# Altium PCB PC110.PcbDoc (part 16 of 24)
Units mm, origin at the board's own origin, x right, y up, seen from the top; angles counter-clockwise.
Board outline 150.05 x 107.35 mm, 10 copper layers (In2.Cu, F.Cu, B.Cu, In1.Cu, In3.Cu, In4.Cu, In5.Cu, In6.Cu, In7.Cu, In8.Cu); 936 components, 1434 nets, 4891 pads, 6088 vias.
Unrouted connection lines stored in the file: 2995.
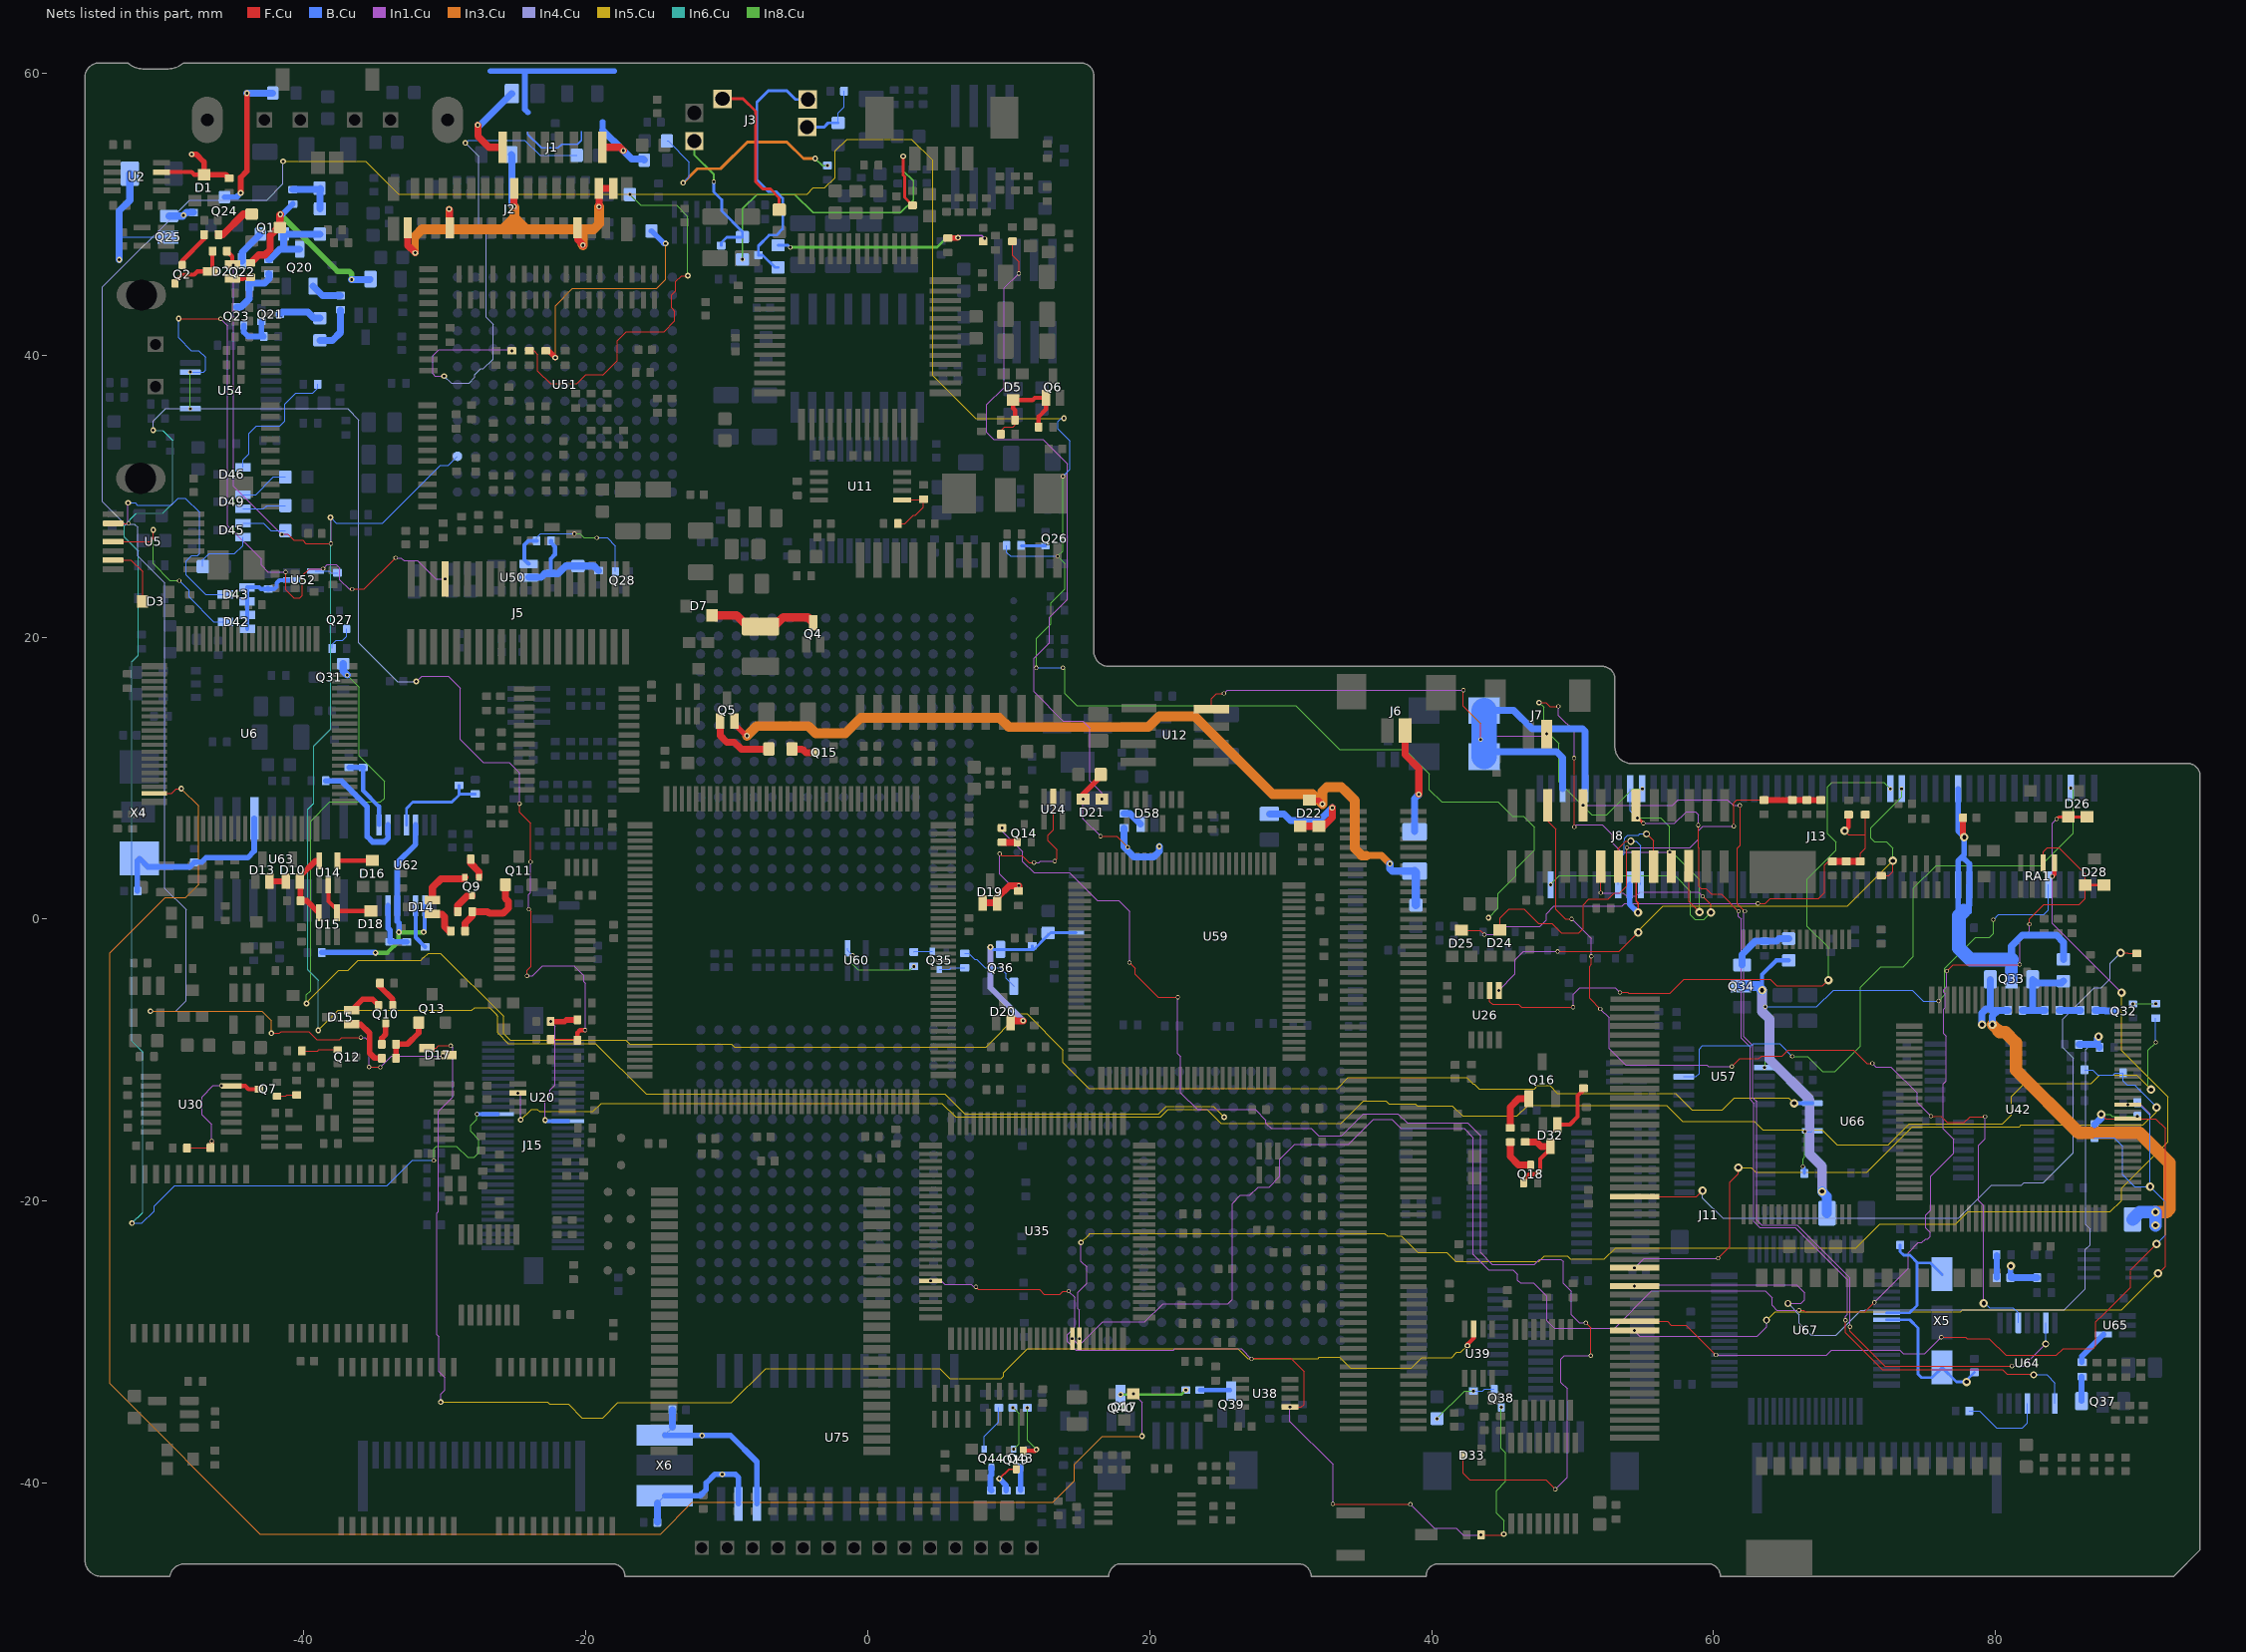
[diagram p23: the nets of this part, all layers, seen from the top]

## Via types
v1: diameter 0.3, hole 0.2, B.Cu to In8.Cu, tented both sides, 1934 vias
v2: diameter 0.4, hole 0.2, F.Cu to B.Cu, tented both sides, 1902 vias
v3: diameter 0.3, hole 0.2, F.Cu to In1.Cu, tented both sides, 1729 vias
v4: diameter 0.6, hole 0.3, F.Cu to B.Cu, tented both sides, 354 vias
v5: diameter 0.5, hole 0.3, F.Cu to B.Cu, tented both sides, 136 vias
v6: diameter 0.4, hole 0.2, B.Cu to In8.Cu, tented both sides, 12 vias
v7: diameter 0.3, hole 0.2, F.Cu to B.Cu, tented both sides, 6 vias
v8: diameter 0.6, hole 0.2, F.Cu to B.Cu, tented both sides, 4 vias
v9: diameter 0.5, hole 0.2, B.Cu to In8.Cu, tented both sides, 3 vias
v10: diameter 0.5, hole 0.2, F.Cu to B.Cu, tented both sides, 2 vias
v11: diameter 0.4, hole 0.3, F.Cu to B.Cu, tented both sides, 2 vias
v12: diameter 0.3, hole 0.2, F.Cu to In4.Cu, tented both sides, 2 vias
v13: diameter 0.6, hole 0.3, B.Cu to In8.Cu, tented both sides, 1 vias
v14: diameter 0.3, hole 0.2, F.Cu to In3.Cu, tented both sides, 1 vias

## Nets (pads, with @x,y where several pads share a name; then routed paths per layer and width w, separated by ;. In a path a pad name is that pad's centre, name@x,y a point inside that pad or via, vN(x,y) a via of type N, cw(c..) or ccw(c..) an arc to the next point about the centre after c; other vN are vias at no path point) (continued)
Net-(C238-+): C238.1 Q33.1 R293.1 R297.2 | length 6.1
  B.Cu w0.08: 82.63,-6.43 82.66,-6.46 ; Q33.1@82.63,-4.27 Q33.1@82.755,-4.395
  B.Cu w0.5: R293.1@81.9,-6.46 82.66,-6.46 R297.2@83.5,-6.46 ; 82.63,-6.43 Q33.1@82.63,-4.27 ; Q33.1@82.755,-4.395 82.89,-4.53 84.675,-4.53 C238.1@84.81,-4.395
Net-(C238--): C93.1 C238.2 C239.2 J13.13 J13.88 J13.89 Q33.2 | length 36.1
  F.Cu w0.4: C93.1@77.69,7.19 77.68,7.18 77.68,5.92 v4(77.78,5.82)
  B.Cu w0.4: J13.13@77.34,9.25 77.34,6.26 v4(77.78,5.82) ; 77.73,0.13 77.73,0.58 ; v4@77.73,5.77 v4(77.78,5.82) ; v4@77.76,5.8 v4(77.78,5.82) ; J13.89@78.13,2.46 J13.89@78.14,2.45 ; J13.88@77.34,2.45 77.34,4.14 77.63,4.43 ; J13.88@77.34,2.45 77.34,0.97 77.73,0.58 ; J13.88@77.34,2.45 77.34,0.61 77.66,0.29 77.88,0.29 78.11,0.52 78.11,2.42 J13.89@78.14,2.45 ; 77.63,4.43 77.78,4.58 v4(77.78,5.82) ; 77.63,4.43 78.14,3.92 J13.89@78.14,2.45 ; 77.73,0.58 78.14,0.99 J13.89@78.14,2.45
  B.Cu w0.5: Q33.2@81.13,-4.183 81.13,-1.9 81.89,-1.14 84.32,-1.14 84.81,-1.63 C238.2@84.81,-2.845
  B.Cu w0.9: Q33.2@81.13,-4.183 81.13,-2.86
  B.Cu w1: 77.73,0.58 77.39,0.24 77.39,-2.05 78.2,-2.86 81.13,-2.86
Net-(C240-+): C240.1 Q34.1 R294.2 | length 4.8
  B.Cu w0.08: C240.1@65.145,-1.56 C240.1@65.33,-1.375
  B.Cu w0.5: Q34.1@62.02,-3.25 62.02,-2.5 62.95,-1.57 R294.2@63.62,-1.57 64.44,-1.57 64.635,-1.375 C240.1@65.33,-1.375
Net-(C240--): C240.2 F3.2 Q34.2 | length 22.8
  In4.Cu w0.7: v4(63.44,-5.04) 63.44,-6.56 63.96,-7.08 63.96,-9.93 66.81,-12.78 66.81,-16.65 67.69,-17.53 v4(67.69,-19.31)
  B.Cu w0.3: v4(63.44,-5.04) 63.44,-3.93 64.445,-2.925 C240.2@65.33,-2.925
  B.Cu w0.7: Q34.2@61.932,-4.75 63.15,-4.75 v4(63.44,-5.04) ; v4(67.69,-19.31) 68.04,-19.66 F3.2@68.04,-20.86
Net-(C245--): C245.2 D22.2 F1.1 Q5.1 | length 62.1
  F.Cu w0.4: Q5.1@-9.47,14.04 -9.47,13.86 -8.63,13.02 v2(-8.57,13.02) ; D22.2@31.33,8.445 31.355,8.42 32,8.42 v2(32.25,8.17)
  In3.Cu w0.5: 35.35,4.51 36.46,4.51 v2(37.04,3.93)
  In3.Cu w0.7: v2(-8.57,13.02) -7.89,13.7 -4.21,13.7 -3.69,13.18 -1.59,13.18 -0.48,14.29 9.34,14.29 10,13.63 19.9,13.63 20.67,14.4 23.19,14.4 28.71,8.88 31.54,8.88 v2(32.25,8.17) 32.25,9.05 32.32,9.12 32.57,9.37 32.62,9.37 33.6,9.37 33.93,9.04 34.54,8.43 34.54,8.22 34.54,5.02 34.82,4.74 35.05,4.51 35.35,4.51
  B.Cu w0.5: v2(37.04,3.93) 37.04,3.57 37.2,3.41 F1.1@38.79,3.41
  B.Cu w0.6: F1.1@38.79,3.41 38.89,3.31 C245.2@38.89,0.995
Net-(C246-+): C246.1 D20.1 Q36.3 R327.1 U59.11 | length 14.6
  F.Cu w0.08: D20.1@10.12,-7.35 D20.1@10.27,-7.2
  F.Cu w0.5: D20.1@10.27,-7.2 v2(11.02,-7.2)
  In4.Cu w0.08: v2(11.02,-7.2) 11.02,-7.18
  In4.Cu w0.4: v2(8.7,-1.98) 8.7,-4.86 11.02,-7.18
  B.Cu w0.08: Q36.3@9.25,-2.15 9.41,-2.15 Q36.3@9.42,-2.14 ; C246.1@12.67,-1.26 12.8,-1.13 C246.1@12.8,-0.965
  B.Cu w0.2: v2(8.7,-1.98) 8.87,-2.15 9.25,-2.15 R327.1@11.66,-2.15 ; R327.1@11.67,-1.89 11.66,-1.9 R327.1@11.66,-2.15 ; U59.11@14.79,-0.96 12.97,-0.96 12.67,-1.26 11.78,-2.15 R327.1@11.66,-2.15
Net-(C257-+): C257.1 C261.1 U63.3 X4.1 | length 13.5
  B.Cu w0.08: X4.1@-51.8,4.16 X4.1@-51.66,4.3
  B.Cu w0.4: C261.1@-51.8,1.99 X4.1@-51.8,4.16 ; X4.1@-51.66,4.3 -51.07,3.71 -48.09,3.71 C257.1@-47.76,4.04 -47.26,4.04 -46.94,4.36 -43.99,4.36 -43.515,4.835 U63.3@-43.515,7.16
Net-(C264--): C264.2 U67.22 X5.2 | length 9.5
  B.Cu w0.2: U67.22@72.26,-27.91 73.91,-27.91 74.42,-27.4 74.42,-24.43 74.47,-24.38 ; C264.2@73.235,-23.11 73.235,-23.585 73.49,-23.84 73.93,-23.84 74.47,-24.38 ; X5.2@76.21,-25.2 75.39,-24.38 74.47,-24.38
Net-(C266-Pad1): C266.1 C269.2 | length 2.7
  B.Cu w0.08: v4@81.06,-24.62 v4(81.08,-24.6)
  B.Cu w0.4: C266.1@81.06,-25.43 v4@81.06,-24.62
  B.Cu w0.5: C266.1@81.105,-25.43 C269.2@82.955,-25.43
Net-(C266-Pad2): C266.2 R362.2 | length 1.6
  B.Cu w0.08: R362.2@80.06,-23.815 R362.2@80.09,-23.815
  B.Cu w0.4: C266.2@80.09,-25.43 R362.2@80.09,-23.815
Net-(C268--): C268.2 U67.23 X5.1 | length 10.9
  B.Cu w0.2: U67.23@72.26,-28.41 73.92,-28.41 74.5,-28.99 74.5,-32.268 74.742,-32.51 75.44,-32.51 75.45,-32.5 75.51,-32.5 76.21,-31.8 77.23,-32.82 v4(77.94,-32.82) 77.94,-32.695 C268.2@78.49,-32.145
Net-(C270-Pad1): C270.1 U64.11 | length 6.2
  B.Cu w0.08: C270.1@78.135,-34.88 78.85,-34.88 80.06,-36.09 81.9,-36.09 82.26,-35.73 U64.11@82.26,-34.353
Net-(C281--): C281.2 U75.26 X6.1 | length 12.3
  B.Cu w0.08: X6.1@-14.41,-36.59 X6.1@-13.85,-36.03
  B.Cu w0.4: X6.1@-14.41,-36.59 -14.38,-36.62 v2(-11.75,-36.62) -9.73,-36.62 -7.86,-38.49 U75.26@-7.86,-41.465
  B.Cu w0.5: X6.1@-13.85,-36.03 C281.2@-13.85,-34.8
Net-(C283-+): C283.1 U75.27 X6.2 | length 10.2
  B.Cu w0.08: X6.2@-14.93,-41.41 X6.2@-14.41,-40.89
  B.Cu w0.4: X6.2@-14.41,-40.89 -11.89,-40.89 -11.46,-40.46 -11.46,-39.98 -10.85,-39.37 v2(-10.32,-39.37) -9.39,-39.37 -9.16,-39.6 U75.27@-9.16,-41.465
  B.Cu w0.5: C283.1@-14.93,-42.78 X6.2@-14.93,-41.41
Net-(D1-K): D1.2 R4.2 U2.3 | length 7
  F.Cu w0.3: U2.3@-50.09,52.99 -47.96,52.99 -47.775,52.805 D1.2@-47.08,52.805
  F.Cu w0.4: v2(-47.96,54.25) -47.62,54.25 -47.08,53.71 D1.2@-47.08,52.805 -45.555,52.805 R4.2@-45.3,52.55
Net-(D2-A): D2.2 R3.1 | length 1.3
  F.Cu w0.4: D2.2@-45.07,45.44 -44.34,45.44 -44.26,45.52 R3.1@-43.78,45.52
Net-(D2-common): D2.3 Q2.1 R12.1 | length 4.3
  F.Cu w0.3: Q2.1@-49.13,45.23 -48.65,45.71 -47.78,45.71 -47.55,45.94 D2.3@-46.62,45.94 -46.49,46.07 -46.49,47.38 R12.1@-46.48,47.39
Net-(D2-K): D2.1 R12.2 U51.A11 | length 145.1
  F.Cu w0.08: v3(-41.55,27.3) -41.14,27.3 -40.71,26.87 -40.08,26.87 -39.85,26.64 v3(-38.07,26.64)
  F.Cu w0.3: R12.2@-45.46,47.39 -45.07,47 D2.1@-45.07,46.44
  In1.Cu w0.08: v3(-45.01,46.38) -45,46.37 -45,30.72 -41.58,27.3 v3(-41.55,27.3) ; v2(-38.11,28.5) -38.07,28.46 v3(-38.07,26.64)
  In5.Cu w0.08: v2(-38.98,-7.88) -37.57,-6.47 -28.09,-6.47 -27.89,-6.27 -26.81,-6.27 -26.32,-6.76 -26.32,-6.81 -26.26,-6.87 -26.26,-8.04 -25.49,-8.81 -19.31,-8.81 -15.71,-12.41 5.47,-12.41 6.88,-13.82 20.63,-13.82 21.18,-13.27 24.52,-13.27 25.28,-14.03 v2(25.28,-14.04)
  In6.Cu w0.08: v2(-38.98,-7.88) -38.98,-4.32 -39.725,-3.575 -39.725,7.8 -39.3,8.225 -39.3,12.3 -38.1,13.5 -38.1,28.49 v2(-38.11,28.5)
  B.Cu w0.08: v2(-38.11,28.5) -37.71,28.1 -34.41,28.1 -30.31,32.2 -29.74,32.2 U51.A11@-29.1,32.84
Net-(D3-K): D3.2 U5.6 | length 4.5
  F.Cu w0.08: U5.6@-53.533,25.47 -52.26,25.47 -51.435,24.645 D3.2@-51.435,22.54
Net-(D5-K): D5.2 Q6.2 R71.1 R74.1 R78.2 | length 7.9
  F.Cu w0.08: R71.1@9.44,34.41 9.44,34.64 9.72,34.92 10.3,34.92 10.45,35.07 R78.2@10.45,35.4
  F.Cu w0.3: R78.2@10.45,35.4 10.45,36.09 10.31,36.23 D5.2@10.31,36.825 11.685,36.825 11.84,36.98 Q6.2@12.64,36.98 12.64,36.17 12.12,35.65 R74.1@12.12,34.91
Net-(D7-K): D7.3 L4.2 Q4.3 | length 7.9
  F.Cu w0.6: D7.3@-11.035,21.55 -9.3,21.55 -8.5,20.75 L4.2@-7.6,20.75 -6.66,20.75 -5.99,21.42 -4.26,21.42 Q4.3@-3.87,21.03
Net-(D10-A): D10.2 D13.1 | length 1.2
  F.Cu w0.4: D13.1@-42.44,2.69 D10.2@-41.27,2.69
Net-(D10-K): C58.2 D10.1 U14.5 U15.5 | length 5.2
  F.Cu w0.08: D10.1@-40.27,2.79 D10.1@-40.27,2.69 D10.1@-40.23,2.65
  F.Cu w0.4: D10.1@-40.27,2.79 -40.27,3.03 -39.15,4.15 U14.5@-38.91,4.15 ; D10.1@-40.23,2.65 C58.2@-40.23,1.31 -39.79,1.31 U15.5@-38.95,0.47
Net-(D14-Pad2): D14.2 R93.1 | length 2.2
  F.Cu w0.5: D14.2@-30.88,0.36 -30.21,0.36 -30.01,0.16 -30.01,-0.53 -29.7,-0.84 R93.1@-29.58,-0.84
Net-(D15-Pad2): D15.2 R95.1 | length 4
  F.Cu w0.4: D15.2@-36.6,-7.45 -35.97,-7.45 -35.34,-8.08 -35.34,-9.49 -34.98,-9.85 R95.1@-34.47,-9.85
Net-(D16-K): D16.2 U14.4 | length 2.5
  F.Cu w0.08: D16.2@-35.155,4.15 D16.2@-35.14,4.165
  F.Cu w0.3: U14.4@-37.61,4.15 D16.2@-35.155,4.15
Net-(D17-Pad2): D17.2 U39.3 | length 106.6
  F.Cu w0.08: D17.2@-31.27,-9.14 -30.61,-9.14 -30.44,-8.97 v3(-29.58,-8.97)
  F.Cu w0.3: v2(42.54,-30.25) 42.54,-30.15 42.99,-29.7 U39.3@42.99,-29.05
  In1.Cu w0.08: v2(-30.29,-34.25) -30.29,-33.67 -30.01,-33.39 -30.01,-32.51 -30.42,-32.1 -30.42,-29.6 -30.55,-29.47 -30.55,-20.83 -30.44,-20.72 -30.44,-13.62 -29.44,-12.62 -29.44,-9.11 v3(-29.58,-8.97)
  In5.Cu w0.08: v2(-30.29,-34.25) -22.73,-34.25 -22.58,-34.4 -21.22,-34.4 -20.26,-35.36 -18.78,-35.36 -17.71,-34.29 -9.66,-34.29 -7.24,-31.87 5.11,-31.87 5.82,-32.58 9.47,-32.58 9.63,-32.42 9.63,-32.16 11.34,-30.45 26.25,-30.45 26.95,-31.15 31.94,-31.15 32.02,-31.07 33.47,-31.07 34.23,-31.83 38.56,-31.83 39.29,-31.1 41.41,-31.1 41.79,-30.72 42.07,-30.72 v2(42.54,-30.25)
Net-(D17-Pad3): D17.3 R254.2 | length 248.4
  F.Cu w0.08: v2(-42.3,-8.09) -41.72,-8.09 -41.6,-7.97 -39.65,-7.97 -39.07,-8.55 -37.46,-8.55 -37.3,-8.39 v3(-35.96,-8.39) ; v3(-35.37,-10.48) -34.59,-10.48 v3(-34.57,-10.5) ; v3(-30.14,-9.7) -29.78,-9.7 D17.3@-29.72,-9.64
  In1.Cu w0.08: v3(-35.96,-8.39) -35.64,-8.39 -35.37,-8.66 v3(-35.37,-10.48) ; v3(-34.57,-10.5) -33.77,-9.7 v3(-30.14,-9.7)
  In3.Cu w0.08: v2(-50.88,-6.53) -42.97,-6.53 -42.3,-7.2 v2(-42.3,-8.09)
  In4.Cu w0.08: v2(-50.88,-6.53) -49.1,-6.53 -48.36,-5.79 -48.36,0.68 -49.87,2.19 -49.87,23.85 -51.77,25.75 -51.77,27.79 -52.01,28.03 -52.68,28.03 -54.27,29.62 -54.27,44.84 -48.11,51 -42.63,51 -41.47,52.16 v2(-41.47,53.75)
  In5.Cu w0.08: v2(-41.47,53.75) -35.62,53.75 -33.3,51.43 -4.3,51.43 -3.86,51.87 -3.05,51.87 -2.32,52.6 -2.31,52.6 -2.31,54.49 -1.47,55.33 3.11,55.33 4.62,53.82 4.62,38.56 7.65,35.53 v2(13.92,35.53)
  In8.Cu w0.08: v1(11.96,17.83) 11.96,19.93 12.99,20.96 12.99,22.42 13.99,23.42 13.99,25.22 v1(13.47,25.74) 13.85,26.12 v1(13.85,31.41) ; v1(13.85,17.84) 14,17.69 14,16 14.84,15.16 30.37,15.16 33.48,12.05 38.1,12.05 39.84,10.31 39.84,9.17 40.7,8.31 44.72,8.31 45.72,7.31 46.5,7.31 47.3,6.51 47.3,4.91 45.98,3.59 45.98,3.09 44.71,1.82 44.71,0.78 v2(44.03,0.1)
  B.Cu w0.08: R254.2@9.85,26.51 9.85,26.02 10.13,25.74 v1(13.47,25.74) ; v1(11.96,17.83) 13.84,17.83 v1(13.85,17.84) ; v1(13.85,31.41) 14.35,31.91 14.35,33.91 13.49,34.77 13.49,35.31 13.71,35.53 v2(13.92,35.53)
Net-(D18-K): D18.2 U14.2 U15.4 | length 4.7
  F.Cu w0.08: U15.4@-37.65,0.47 -37.65,0.67 U15.4@-37.555,0.575
  F.Cu w0.3: U14.2@-38.26,2.45 -38.26,1.28 U15.4@-37.65,0.67 ; U15.4@-37.555,0.575 D18.2@-35.24,0.575
Net-(D19-Pad1): D19.1 D19.2 R112.2 U24.2 | length 16
  F.Cu w0.08: v3(9.35,4.64) 9.49,4.5 10.96,4.5 11.44,4.02 v3(11.8,4.02) ; R112.2@10.69,1.99 R112.2@10.72,2.02 ; U24.2@13.16,8.65 13.16,6.34 12.78,5.96 12.78,5.57 13.43,4.92 13.43,4.29 v3(13.26,4.12)
  F.Cu w0.5: D19.2@8.17,1.16 D19.1@9.17,1.16 9.17,1.51 10.04,2.38 10.43,2.38 v3(10.72,2.38) R112.2@10.72,2.02
  In1.Cu w0.08: v3(9.35,4.64) 9.35,3.21 10.18,2.38 v3(10.72,2.38) ; v3(11.8,4.02) 12.14,4.02 12.24,4.12 v3(13.26,4.12)
Net-(D21-A-Pad3): D21.3 R31.1 | length 48.9
  F.Cu w0.08: R31.1@10.27,48.08 10.27,47.07 10.72,46.62 v3(10.72,45.8)
  In1.Cu w0.08: v3(10.72,45.8) 9.68,44.76 9.68,37.72 8.45,36.49 8.45,34.52 8.93,34.04 12.44,34.04 14.17,32.31 14.17,22.67 12.9,21.4 12.9,19.61 11.79,18.5 11.79,16.13 13.86,14.06 15.27,14.06 15.76,13.57 15.76,9.81 16.6,8.97 v3(16.6,8.525)
Net-(D22-A-Pad1): D22.1 D22.3 R313.2 | length 8.2
  F.Cu w0.5: D22.3@30.68,6.595 D22.1@32.005,6.595 32.325,6.595 32.95,7.22 v2(32.95,7.9)
  B.Cu w0.5: R313.2@28.49,7.462 29.518,7.462 29.99,6.99 32.04,6.99 v2(32.95,7.9)
Net-(D23-K): D21.1 D23.1 R308.1 | length 15.5
  F.Cu w0.08: v3(16.52,5.89) 17.66,5.89 v3(18.44,5.11)
  F.Cu w0.4: v3(15.275,8.525) 15.275,8.865 16.528,10.118 D23.1@16.527,10.26
  In1.Cu w0.08: v3(15.275,8.525) 15.275,7.135 v3(16.52,5.89) ; v3(18.44,5.11) 18.44,4.76 18.62,4.58 20.52,4.58 20.68,4.74 v2(20.68,5.16)
  B.Cu w0.5: R308.1@18.18,6.47 18.18,5.12 18.89,4.41 20.28,4.41 20.68,4.81 v2(20.68,5.16)
Net-(D24-K): D24.2 R132.2 R136.2 R137.2 R141.2 | length 32.4
  F.Cu w0.08: D24.2@44.84,-0.765 44.84,0.07 45.49,0.72 46.55,0.72 47.58,-0.31 48.54,-0.31 49.21,-0.98 50.43,-0.98 50.75,-0.66 50.75,1.02 51.15,1.42 52.52,1.42 52.96,1.86 53.35,1.86 53.85,2.36 53.85,5.07 v3(53.86,5.08) ; v3(61.44,6.6) 61.44,8.24 61.65,8.45 R137.2@63.58,8.45
  F.Cu w0.4: R137.2@63.58,8.45 R136.2@65.6,8.45 R141.2@66.61,8.45 R132.2@67.61,8.45
  In1.Cu w0.08: v3(53.86,5.08) 58.32,5.08 58.91,5.67 58.91,6.27 59.24,6.6 v3(61.44,6.6)
Net-(D25-K): D25.2 R133.2 R138.2 R140.1 R142.2 R143.1 | length 38.3
  F.Cu w0.08: D25.2@42.105,-0.78 43.43,-0.78 v3(43.74,-1.09) ; v3(63.14,1.11) 63.66,1.11 64.02,1.47 67.46,1.47 67.87,1.88 67.87,3.85 68.12,4.1 R133.2@68.43,4.1 ; v4(69.3,6.26) 69.57,5.99 70.76,5.99 ; R138.2@70.41,4.1 70.41,4.67 70.76,5.02 70.76,5.99 ; R143.1@70.76,7.42 70.76,5.99
  F.Cu w0.3: v4(69.3,6.26) 69.57,6.53 R140.1@69.57,7.42
  F.Cu w0.5: R133.2@68.43,4.1 R142.2@69.4,4.1 R138.2@70.41,4.1
  In1.Cu w0.08: v3(43.74,-1.09) 44.51,-1.09 45.09,-0.51 47.69,-0.51 48.13,-0.07 48.13,0.38 48.68,0.93 53.5,0.93 53.68,1.11 v3(63.14,1.11)
Net-(D32-A): D32.2 R129.1 | length 3.9
  F.Cu w0.3: D32.2@48.91,-14.57 49.8,-14.57 50.36,-14.01 50.36,-12.52 50.77,-12.11 R129.1@50.77,-11.99
Net-(D32-common): D32.3 Q18.1 R180.1 | length 5.6
  F.Cu w0.08: Q18.1@46.52,-18.73 Q18.1@46.52,-18.51
  F.Cu w0.3: Q18.1@46.52,-18.51 46.94,-18.09 47.39,-18.09 47.7,-17.78 47.7,-17.01 48.41,-16.3 D32.3@48.41,-16.12
  F.Cu w0.5: R180.1@46.64,-15.8 47.46,-15.8 47.78,-16.12 D32.3@48.41,-16.12
Net-(D33-Pad3): D33.3 R114.2 | length 93.9
  F.Cu w0.08: v3(18.57,-3.08) 18.96,-3.47 18.96,-3.9 20.61,-5.55 21.98,-5.55 v3(21.99,-5.54) ; D33.3@42.23,-38.01 42.23,-39.29 42.69,-39.75 48.09,-39.75 v3(48.77,-40.43) ; v3(50.93,-28.63) 51.29,-28.99 v3(51.29,-30.96)
  In1.Cu w0.08: v3(9.53,6.47) 9.53,6.25 10.99,4.79 10.99,4.1 11.8,3.29 14.31,3.29 16.29,1.31 17.79,1.31 18.57,0.53 v3(18.57,-3.08) ; v3(21.99,-5.54) 21.99,-9.53 22.2,-9.74 22.2,-12.31 23.39,-13.5 27.49,-13.5 28.24,-14.25 28.24,-14.47 28.62,-14.85 31.46,-14.85 31.97,-15.36 33.62,-15.36 35.17,-13.81 37.62,-13.81 38.27,-14.46 42.55,-14.46 43.46,-15.37 43.46,-23.65 44.3,-24.49 47.28,-24.49 47.65,-24.12 49.16,-24.12 49.33,-24.29 49.33,-25.82 49.91,-26.4 49.91,-28.07 50.47,-28.63 v3(50.93,-28.63) ; v3(48.77,-40.43) 49.61,-39.59 49.61,-33.3 49.17,-32.86 49.17,-31.19 49.4,-30.96 v3(51.29,-30.96)
Net-(D36-K): D36.1 L14.2 R236.2 | length 3.7
  B.Cu w0.5: R236.2@-40.78,51.75 -38.907,51.75 L14.2@-38.827,51.83 ; D36.1@-38.857,50.38 -38.857,51.8 L14.2@-38.827,51.83 ; L14.2@-38.857,51.627 -38.827,51.657 L14.2@-38.827,51.83
Net-(D38-A): D38.2 Q21.3 | length 3.1
  B.Cu w0.5: Q21.3@-41.71,42.89 -41.54,43.06 -39.72,43.06 -39.29,42.63 D38.2@-38.86,42.63
Net-(D38-K): D38.1 R232.2 | length 3.3
  B.Cu w0.5: D38.1@-38.86,41.055 -37.965,41.055 -37.39,41.63 R232.2@-37.39,43.21
Net-(D39-A): D39.2 D55.2 J13.46 J13.48 | length 23.2
  B.Cu w0.08: D55.2@43.72,11.53 D55.2@44.06,11.87
  B.Cu w0.5: D39.2@43.72,14.8 45.83,14.8 47.13,13.5 50.71,13.5 50.89,13.32 J13.46@50.89,9.25 ; D55.2@44.06,11.87 48.87,11.87 49.29,11.45 J13.48@49.29,9.25
  B.Cu w1.8: D55.2@43.72,11.53 D39.2@43.72,14.8
Net-(D41-K): D41.1 R260.1 R266.2 R271.2 U50.2 | length 8
  B.Cu w0.3: R271.2@-22.49,24.52 -22.49,25.56 -22.18,25.87 -22.18,26.41 -22.46,26.69 R260.1@-22.46,26.83
  B.Cu w0.5: U50.2@-24.052,24.25 -23.16,24.25 -22.89,24.52 R271.2@-22.49,24.52 -21.96,24.52 -21.432,25.047 D41.1@-20.56,25.047 -19.427,25.047 R266.2@-19.1,24.72
Net-(D42-Pad1): D42.1 D42.2 D43.1 D43.2 R287.1 U52.2 | length 6.6
  B.Cu w0.3: D42.1@-44.01,20.59 D42.2@-44.01,21.59 -44.02,21.6 D43.1@-44.02,22.54 D43.2@-44.02,23.54 -43.16,23.54 -43.04,23.42 R287.1@-42.52,23.42 -42.1,23.42 -41.93,23.59 -41.93,23.85 -41.73,24.05 U52.2@-40.88,24.05
  B.Cu w0.4: R287.1@-42.54,23.44 R287.1@-42.52,23.42
Net-(D42-Pad3): D42.3 U5.4 | length 13.1
  F.Cu w0.08: U5.4@-53.533,26.77 -50.86,26.77 -50.68,26.95 v2(-50.68,27.61)
  In8.Cu w0.08: v2(-50.68,27.61) -50.68,25.22 -49.5,24.04 -49.47,24.01 v1(-48.84,24.01)
  B.Cu w0.08: v1(-48.84,24.01) -48.835,24.01 -48.15,23.325 -48.15,22.84 -46.4,21.09 D42.3@-45.56,21.09
Net-(D43-Pad3): D43.3 U5.2 | length 16.9
  F.Cu w0.08: U5.2@-53.533,28.07 v3(-52.43,28.07)
  In1.Cu w0.08: v2(-52.47,29.53) -52.47,28.11 v3(-52.43,28.07)
  B.Cu w0.08: v2@-52.41,29.59 v2(-52.47,29.53) -51.96,29.53 -51.8,29.37 -49.4,29.37 -48.9,29.87 -48.4,29.87 -47.38,28.85 -47.38,25.94 -47.53,25.79 -47.96,25.79 -48.35,25.4 -48.35,24.42 -46.97,23.04 D43.3@-45.57,23.04
Net-(D44-A): D44.2 D45.1 | length 4.3
  B.Cu w0.08: D44.2@-47.168,25.01 -47.168,25.482 -46.73,25.92 -44.91,25.92 -44.33,26.5 D45.1@-44.33,27.1
Net-(D46-Pad2): D46.2 R286.1 | length 9.8
  B.Cu w0.08: D46.2@-44.32,32.05 -44.32,32.57 -43.9,32.99 -43.9,34.46 -43.37,34.99 -41.71,34.99 -41.35,35.35 -41.35,36.53 -40.56,37.32 -39.38,37.32 -39.02,37.68 R286.1@-39.02,37.95
Net-(D48-A): D45.2 D48.2 | length 3.2
  B.Cu w0.08: D45.2@-44.33,28.1 -42.88,28.1 -42.35,27.57 D48.2@-41.307,27.57
Net-(D50-A): D49.1 D50.2 | length 3.1
  B.Cu w0.08: D49.1@-44.32,29.1 -42.87,29.1 -42.63,29.34 D50.2@-41.307,29.34
Net-(D51-A): D49.2 D51.2 | length 3.5
  B.Cu w0.08: D49.2@-44.32,30.1 -43.41,30.1 -42.15,31.36 D51.2@-41.307,31.36
Net-(D58-K): D58.1 R308.2 | length 1.5
  B.Cu w0.5: R308.2@18.18,7.49 18.61,7.49 D58.1@19.35,6.75
Net-(J1-GND-Pad1): J1.1 R231.2 | length 23.1
  F.Cu w0.5: J1.1@-18.84,54.75 -17.58,54.75 v2(-17.34,54.51)
  B.Cu w0.08: -17.98,60.16 -17.94,60.2
  B.Cu w0.1: -24.11,55.85 -24.11,55.66 -23.15,54.7 -21.96,54.7 -21.69,54.97 -20.59,54.97 -20.31,55.25 -20.31,55.87
  B.Cu w0.4: -26.76,60.16 -24.32,60.16 ; -24.11,57.23 -24.32,57.44 -24.32,60.16 ; -18.81,55.98 -18.81,56.56 ; -17.98,60.16 -24.32,60.16
  B.Cu w0.5: -18.81,55.98 v2(-17.34,54.51) -16.74,53.91 -15.925,53.91 R231.2@-15.855,53.84
Net-(J1-GND-Pad8): J1.8 R230.2 | length 6.2
  F.Cu w0.5: v2(-27.66,56.33) -27.66,55.54 -26.87,54.75 J1.8@-25.89,54.75
  B.Cu w0.5: v2(-27.66,56.33) -27.51,56.33 -25.28,58.56 R230.2@-25.242,58.56
Net-(J2-Pin_1): J2.1 J2.7 J2.16 J2.25 J2.28 J2.30 L10.1 | length 34.7
  F.Cu w0.5: J2.1@-32.63,49.03 -32.62,49.02 -32.62,47.78 v2(-32.1,47.26) ; v2(-29.7,50.36) -29.66,50.32 -29.66,49.06 J2.7@-29.63,49.03 ; v2(-25.1,50.54) -25.1,51.81 J2.16@-25.08,51.83 ; J2.25@-20.58,49.03 -20.58,48.19 v2(-20.2,47.81) ; v2(-19.06,50.53) -19.06,51.81 J2.28@-19.08,51.83 J2.30@-18.03,51.83
  In3.Cu w0.08: -32.1,48.45 -32.03,48.52
  In3.Cu w0.5: v2(-32.1,47.26) -32.1,48.45 ; -29.7,48.93 v2(-29.7,50.36)
  In3.Cu w0.7: -32.03,48.52 -31.62,48.93 -30.32,48.93 -26.06,48.93 ; v2(-25.1,50.54) -25.06,50.5 -25.06,49.76 ; v2(-20.2,47.81) -20.22,47.83 -20.22,48.8 -20.09,48.93 ; v2(-19.06,50.53) -19.06,49.91 -19.06,49.32 -19.38,49 -19.45,48.93 -20.09,48.93 ; -26.06,48.93 -25.89,48.93 -25.06,49.76 ; -26.06,48.93 -25.06,48.93 ; -25.06,48.93 -24.21,48.93 ; -25.06,48.93 -25.06,49.76 ; -25.06,49.76 -24.23,48.93 -24.21,48.93 ; -24.21,48.93 -20.09,48.93
  B.Cu w0.5: L10.1@-25.278,54.23 -25.24,54.193 -25.24,50.68 v2(-25.1,50.54)
Net-(J3-G): J3.3 L2.2 | length 10.7
  F.Cu w0.2: J3.3@-10.3,58.19 -8.85,58.19 -7.96,57.3 -7.96,52.31 -7.44,51.79 -6.9,51.79 -6.28,51.17 L2.2@-6.28,50.317
Net-(J3-MO): C148.2 J3.5 L8.2 | length 9.4
  In8.Cu w0.15: -12.31,54.53 -12.31,54.22 -10.92,52.83 v1(-10.92,52.31)
  B.Cu w0.2: v1(-10.92,52.31) -10.92,51.59 -10.36,51.03 -10.36,50.23 -8.89,48.76 L8.2@-8.89,48.375 -9.995,48.375 -10.4,47.97 C148.2@-10.4,47.78
Net-(J3-SI): C165.1 J3.2 L7.2 | length 4.7
  B.Cu w0.08: L7.2@-2.1,56.477 -2.1,57.2 -1.68,57.62 C165.1@-1.68,58.73
  B.Cu w0.2: J3.2@-4.3,56.19 -3.09,56.19 -2.802,56.477 L7.2@-2.1,56.477
Net-(J3-SO): C159.2 J3.1 L5.1 | length 18.9
  B.Cu w0.2: L5.1@-6.36,46.223 -6.572,46.223 -7.45,47.1 C159.2@-7.76,47.1 -7.76,47.75 -6.99,48.52 -6.47,48.52 -6.03,48.96 -6.03,51.13 -6.5,51.6 -7.03,51.6 -7.86,52.43 -7.86,57.94 -7.05,58.75 -5.74,58.75 -5.13,58.14 J3.1@-4.25,58.14
Net-(J5-Pin_17): J5.17 U54.2 U54.6 | length 49.5
  F.Cu w0.08: v2(-48.88,42.6) -45.91,42.6 v3(-45.9,42.59) ; v3(-41.29,24.63) -41.29,23.36 -40.71,22.78 -40.27,22.78 -40.1,22.95 -40.1,24.36 -39.61,24.85 v3(-38.63,24.85) ; v3(-36.57,23.41) -35.71,23.41 v3(-33.49,25.63)
  In1.Cu w0.08: v3(-45.9,42.59) -45.4,42.09 -45.4,27.92 -43.02,25.54 -43.02,25.12 -42.53,24.63 v3(-41.29,24.63) ; v3(-38.63,24.85) -38.33,25.15 -37.7,25.15 -37.44,24.89 -37.44,24.06 -36.79,23.41 v3(-36.57,23.41) ; v3(-33.49,25.63) -33.1,25.63 -32.91,25.44 -31.93,25.44 -30.62,24.13 v3(-29.98,24.13)
  In8.Cu w0.08: v1(-48.055,36.21) -48.06,36.215 -48.06,38.805 v1(-48.055,38.81)
  B.Cu w0.08: v2(-48.88,42.6) -48.88,41.23 -47.99,40.34 -47.45,40.34 -46.97,39.86 -46.97,38.96 -47.12,38.81 v1(-48.055,38.81)
Net-(J6-Pin_1): F1.2 J6.1 | length 7.7
  F.Cu w0.5: J6.1@38.11,13.38 38.11,11.67 39.09,10.69 v2(39.09,8.86)
  B.Cu w0.5: F1.2@38.79,6.21 38.79,8.56 v2(39.09,8.86)
Net-(J7-Pin_1): J7.1 U12.8 | length 27.7
  F.Cu w0.08: U12.8@24.39,14.91 24.39,15.66 24.74,16.01 v3(25.27,16.01) ; v3(42.25,16.24) 42.25,15.12 43.48,13.89 v3(43.48,12.74)
  In1.Cu w0.08: v3(25.27,16.01) 25.5,16.24 v3(42.25,16.24) ; v3(43.48,12.74) 43.74,13 48.02,13 v3(48.16,13.14)
Net-(J8-DRT1#): J8.6 U64.8 | length 66.9
  F.Cu w0.08: v3(58.91,6.67) 58.91,5.07 58.95,5.03 58.95,2.3 59.09,2.16 59.46,2.16 59.83,1.79 60.54,1.79 v3(61.77,0.56) ; v3(69.35,-28.44) 69.35,-29.33 71.97,-31.95 80.48,-31.95 80.81,-32.28 82.68,-32.28 v5(82.71,-32.31)
  F.Cu w0.2: J8.6@54.49,8.08 54.49,7.33 v3(55.02,6.8)
  In1.Cu w0.08: v3(55.02,6.8) 57.24,6.8 58.06,7.62 58.71,7.62 58.91,7.42 v3(58.91,6.67) ; v3(61.77,0.56) 61.77,0.2 61.96,0.01 61.96,-8.43 62.59,-9.06 62.59,-12.8 62.84,-13.05 62.84,-21.46 63.26,-21.88 65.79,-21.88 69.5,-25.59 69.5,-28.02 69.35,-28.17 v3(69.35,-28.44)
  B.Cu w0.08: v5(82.71,-32.31) 83.63,-32.31 84.21,-32.89 U64.8@84.21,-34.353
Net-(J8-RTS1#): J8.9 U64.6 | length 70.7
  F.Cu w0.08: v3(61.86,8.07) 61.9,8.03 61.9,5.24 61.69,5.03 61.69,1.08 v3(62.21,0.56) ; v3(69.67,-28.9) 69.67,-29.22 72.14,-31.69 v3(81.17,-31.69)
  In1.Cu w0.08: v3(50.74,8.08) 57.09,8.08 57.48,8.47 60.99,8.47 61.39,8.07 v3(61.86,8.07) ; v3(62.21,0.56) 62.14,0.49 62.14,-8.33 62.79,-8.98 62.79,-12.68 63.045,-12.935 63.045,-21.325 63.41,-21.69 65.91,-21.69 69.67,-25.45 v3(69.67,-28.9) ; v3(81.17,-31.69) 81.99,-31.69 v5(83.56,-30.12)
  B.Cu w0.08: v5(83.56,-30.12) U64.6@83.56,-28.627
Net-(J8-TXD1): J8.11 U64.3 | length 66.8
  F.Cu w0.08: J8.11@48.24,8.08 48.24,6.95 48.82,6.37 48.82,0.7 49.5,0.02 v3(49.92,0.02) ; v3(51.33,-2.63) 51.33,-3.2 51.2,-3.33 51.2,-5.61 v3(51.96,-6.37) ; v3(61.29,-10.45) 61.85,-9.89 63.22,-9.89 63.41,-9.7 64.86,-9.7 65.29,-9.27 69.92,-9.27 70.87,-10.22 v3(71.27,-10.22) ; v3(75.42,-13.97) 76.14,-13.97 76.58,-14.41 77.78,-14.41 78.18,-14.01 v3(79.26,-14.01)
  In1.Cu w0.08: v3(49.92,0.02) 49.95,0.02 51.33,-1.36 v3(51.33,-2.63) ; v3(51.96,-6.37) 52.59,-7 52.59,-9.16 53.78,-10.35 59.53,-10.35 59.63,-10.45 v3(61.29,-10.45) ; v3(71.27,-10.22) 71.52,-10.47 72.59,-10.47 74.46,-12.34 74.46,-13.01 v3(75.42,-13.97) ; v4(79.16,-27.24) 79.16,-20.33 78.79,-19.96 78.79,-16.03 79.26,-15.56 v3(79.26,-14.01)
  B.Cu w0.08: v4(79.16,-27.24) 79.23,-27.24 79.56,-27.57 81.25,-27.57 81.61,-27.93 U64.3@81.61,-28.627
Net-(J11-CE1#): J11.13 R361.1 R366.1 U42.37 | length 58.4
  F.Cu w0.08: v4(87.5,-13.84) 87.81,-14.15 91.36,-14.15 92.04,-14.83 92.04,-24.62 v4(91.53,-25.13)
  In1.Cu w0.08: v3(54.39,-29.18) 54.77,-29.56 63.09,-29.56 63.76,-28.89 v5(63.76,-28.44)
  In5.Cu w0.08: v5(63.76,-28.44) 64.37,-27.83 77.53,-27.83 77.65,-27.71 88.95,-27.71 v4(91.53,-25.13)
  In8.Cu w0.08: v4(87.5,-13.84) 88.13,-13.84 88.27,-13.98 v1(90.06,-13.98)
  B.Cu w0.5: R366.1@87.02,-14.57 87.5,-14.09 v4(87.5,-13.84)
Net-(J11-CE2#): J11.14 R360.1 R367.1 U42.39 | length 69.3
  F.Cu w0.08: J11.14@54.39,-28.53 56.72,-28.53 56.99,-28.8 58.05,-28.8 v3(60.16,-30.91) ; v3(76.15,-29.65) 77.88,-29.65 77.98,-29.75 79.55,-29.75 80.73,-30.93 84.31,-30.93 84.79,-30.45 86.91,-30.45 87.12,-30.24 87.12,-28.55 87.7,-27.97 87.71,-27.97 89.57,-26.11 89.57,-24.88 v4(91.42,-23.03)
  In1.Cu w0.08: v3(60.16,-30.91) 68,-30.91 68.35,-30.56 73.2,-30.56 73.46,-30.82 74.98,-30.82 v3(76.15,-29.65) ; v3(89.385,-13.15) 90.29,-13.15 90.95,-13.81 90.95,-13.8 90.95,-18.95 v4(90.97,-18.97)
  B.Cu w0.08: R367.1@86.995,-15.49 88.4,-15.49 89,-16.09 89,-18.12 89.85,-18.97 v4(90.97,-18.97) ; R360.1@90.015,-12.98 90.04,-12.98 90.97,-13.91 v4(90.97,-18.97) ; v4@91.24,-18.97 v4(90.97,-18.97) ; v4(91.42,-23.03) 92.05,-22.4 92.05,-20.05 v4(90.97,-18.97)
Net-(J11-CSEL#): J11.28 R145.2 | length 51.9
  F.Cu w0.08: J11.28@54.39,-19.68 58.8,-19.68 v4(59.22,-19.26) ; v4(88.87,-2.39) 89.37,-2.39 89.41,-2.43 R145.2@90.02,-2.43
  In4.Cu w0.08: v4(59.22,-19.26) 59.22,-19.77 60.64,-21.19 77.39,-21.19 79.73,-18.85 81.83,-18.85 82,-18.68 83.39,-18.68 85.52,-16.55 85.52,-9.85 84.78,-9.11 84.78,-7.09 86.99,-4.88 87.48,-4.88 88.12,-4.24 88.12,-3.14 v4(88.87,-2.39)
Net-(J11-IOR#): J11.18 R295.1 R301.2 | length 58.6
  In1.Cu w0.08: v3(54.39,-26.03) 54.47,-25.95 65.89,-25.95 66.45,-26.51 66.45,-27 66.2,-27.25 v5(65.28,-27.25)
  In4.Cu w0.08: v5(65.28,-27.25) 66.08,-28.05 66.08,-28.64 66.93,-29.49 68.68,-29.49 70.44,-27.73 70.75,-27.73 70.78,-27.7 84.89,-27.7 86.37,-26.22 86.37,-23.43 86.71,-23.09 86.71,-21.98 86.39,-21.66 86.39,-9.24 v4(87.3,-8.33)
  B.Cu w0.08: R295.1@85.835,-8.88 R295.1@85.91,-8.88
  B.Cu w0.5: R295.1@85.91,-8.88 85.92,-8.87 R301.2@87.215,-8.87 ; v4(87.3,-8.33) 87.215,-8.415 R301.2@87.215,-8.87 ; R301.2@87.38,-9.1 87.38,-9.035 R301.2@87.215,-8.87
Net-(J11-IOW#): J11.20 R290.2 R299.1 | length 51.8
  F.Cu w0.08: v3(60.33,-24.04) 61.16,-23.21 61.16,-18.65 61.75,-18.06 v4(61.75,-17.61)
  In1.Cu w0.08: v3(54.39,-24.73) 55.07,-24.05 60.32,-24.05 v3(60.33,-24.04)
  In5.Cu w0.08: v4(61.75,-17.61) 62.67,-17.61 63,-17.94 70.89,-17.94 74.11,-14.72 81.69,-14.72 81.81,-14.6 90.47,-14.6 91.41,-13.66 v4(91.41,-13.34)
  B.Cu w0.08: R299.1@86.31,-10.68 86.89,-10.68 87.25,-11.04 88.35,-11.04 88.49,-10.9 R290.2@89.04,-10.9 89.04,-11.48 89.32,-11.76 89.87,-11.76 91.41,-13.3 v4(91.41,-13.34)
Net-(J13-FDD_DRATE0): J13.96 U57.3 | length 31.4
  In8.Cu w0.08: v1(63.602,-10.52) 63.66,-10.462 v1(63.66,-6.21) ; v1(75.95,-5.8) 76.39,-5.36 76.39,-3.48 78.59,-1.28 79.58,-1.28 79.84,-1.02 v1(79.84,-0.04)
  B.Cu w0.08: v1(63.66,-6.21) 67.31,-6.21 68.49,-5.03 74.1,-5.03 74.87,-5.8 v1(75.95,-5.8) ; v1(79.84,-0.04) 80.21,0.33 83.41,0.33 83.74,0.66 J13.96@83.74,2.45
Net-(J13-FDD_DRATE1): J13.3 U57.11 | length 46
  In8.Cu w0.08: v1(65.58,-9.73) 66.67,-9.73 67.74,-10.8 68.62,-10.8 70.42,-9 70.42,-4.81 71.87,-3.36 73.46,-3.36 74.18,-2.64 74.18,2.2 75.79,3.81 83.21,3.81 85.5,6.1 85.5,9.14 v1(85.34,9.3)
  B.Cu w0.08: U57.11@57.877,-11.17 58.76,-11.17 58.99,-10.94 58.99,-9.2 59.21,-8.98 62.69,-8.98 62.83,-8.84 64.71,-8.84 64.71,-8.86 v1(65.58,-9.73)
Net-(J13-Modem_ADCK#): J8.21 J13.59 | length 5.5
  F.Cu w0.1: J8.21@54.49,3.73 54.49,1.29 54.63,1.15 v4(54.63,0.48)
  B.Cu w0.4: J13.59@54.04,2.45 54.04,1.07 v4(54.63,0.48)
Net-(J13-Modem_IRQ1#): J8.20 J13.60 | length 6
  F.Cu w0.08: J8.20@53.24,3.73 53.24,4.99 53.78,5.53 v5(54.12,5.53)
  B.Cu w0.08: v5(54.12,5.53) 54.52,5.53 54.84,5.21 J13.60@54.84,2.45
Net-(J13-Modem_RSRVD1): J8.24 J13.42 | length 15.3
  F.Cu w0.08: J8.24@58.24,3.78 58.24,1.24 58.98,0.5 v4(58.99,0.5)
  In8.Cu w0.08: v1(54.6,7.18) 56.23,7.18 56.87,6.54 56.87,4.93 59,2.8 59,2.61 58.99,2.6 v4(58.99,0.5)
  B.Cu w0.08: J13.42@54.09,9.25 54.09,7.69 v1(54.6,7.18)
Net-(J13-Modem_RSRVD2): J8.23 J13.41 | length 33.4
  F.Cu w0.08: v2(47.62,15.36) 48.12,15.36 48.39,15.09 v3(48.99,15.09) ; v3(50.11,11.43) 50.12,11.42 v3(50.12,6.54) ; v3(56.89,4.75) 56.89,3.83 J8.23@56.99,3.73
  In1.Cu w0.08: v3(48.99,15.09) 48.99,14.45 50.11,13.33 v3(50.11,11.43) ; v3(50.12,6.54) 50.28,6.7 52.09,6.7 52.81,5.98 52.81,5.41 53.47,4.75 v3(56.89,4.75)
  In8.Cu w0.08: v2(47.62,15.36) 47.95,15.03 47.95,13.56 49.04,12.47 49.04,9.73 51.37,7.4 52.42,7.4 54.27,9.25 v1(54.94,9.25)
Net-(J13-Modem_S11): J8.22 J13.58 | length 7.7
  F.Cu w0.08: v5(55.24,6.05) 55.74,5.55 J8.22@55.74,3.73
  B.Cu w0.08: J13.58@53.24,2.45 53.24,4.24 53.65,4.65 53.65,5.54 53.7,5.59 53.7,5.76 53.9,5.96 54.67,5.96 54.76,6.05 v5(55.24,6.05)
Net-(J13-Modem_VPDA#): J8.19 J13.52 | length 24.9
  F.Cu w0.08: v3(51.99,1.87) J8.19@51.99,3.73 ; v3(59.22,1.63) 59.81,1.04 v4(59.81,0.47)
  In1.Cu w0.08: v3@52.05,1.87 53.58,1.87 53.82,1.63 54.48,1.63 54.78,1.93 58.92,1.93 v3(59.22,1.63)
  In8.Cu w0.08: v1(48.44,2.45) 49.07,3.08 57.26,3.08 58.37,1.97 58.37,0.29 58.69,-0.03 59.31,-0.03 v4(59.81,0.47)
Net-(J13-RXD2): J13.18 R135.1 U26.5 | length 41.3
  F.Cu w0.08: v3(48.93,-2.29) 53.3,-2.29 v4(54.66,-0.93) ; R135.1@71.9,3.08 72.43,3.08 72.72,3.37 v4(72.72,4.14)
  In1.Cu w0.08: v3(44.77,-5.05) 45.93,-3.89 45.93,-2.89 46.53,-2.29 v3(48.93,-2.29)
  In5.Cu w0.08: v4(54.66,-0.93) 54.66,-0.82 56.41,0.93 69.51,0.93 v4(72.72,4.14)
  In8.Cu w0.08: v4(72.72,4.14) 72.72,5.05 72.26,5.51 71.39,5.51 71.16,5.74 71.16,6.5 73.34,8.68 v1(73.34,9.25)
Net-(J13-TXD2): J13.19 U26.6 | length 47.2
  F.Cu w0.08: U26.6@44.12,-5.05 44.12,-5.84 44.32,-6.04 46.16,-6.04 46.36,-6.24 v3(50.04,-6.24) ; v3(53.35,-5.19) 53.9,-5.19 53.96,-5.25 56.91,-5.25 57.89,-4.27 64.03,-4.27 64.49,-4.73 67.73,-4.73 v4(68.14,-4.32)
  In1.Cu w0.08: v3(50.04,-6.24) 50.04,-5.33 50.5,-4.87 53.03,-4.87 v3(53.35,-5.19)
  In8.Cu w0.08: v4(68.14,-4.32) 68.14,-2 66.65,-0.51 66.65,2.84 68.69,4.88 68.69,5.46 68.07,6.08 68.07,9.385 68.385,9.7 72.09,9.7 v1(72.54,9.25)
Net-(J15-RAS2): J15.11 R102.2 R103.1 | length 169.6
  F.Cu w0.08: v3(-24.7,8.19) -24.7,7.59 -23.91,6.8 v3(-23.91,4.06) ; v3(-24.17,-4.02) -24.17,-3.63 -23.89,-3.35 -23.89,0.55 v3(-24.04,0.7) ; R102.2@-22.49,-8.51 -20.66,-8.51 R103.1@-20.59,-8.58
  F.Cu w0.3: R103.1@-20.59,-8.58 -20.59,-8.05 -20.41,-7.87 v3(-20.04,-7.87)
  In1.Cu w0.08: v2(-32.03,16.86) -31.64,17.25 -29.75,17.25 -28.89,16.39 -28.89,12.74 -27.28,11.13 -25.45,11.13 -24.7,10.38 v3(-24.7,8.19) ; v3(-24.17,-4.02) -23.77,-4.02 -23.07,-3.32 -20.84,-3.32 -20.13,-4.03 -20.13,-4.45 -20.04,-4.54 v3(-20.04,-7.87) ; v3(-24.04,0.7) -24.04,1.75 -23.91,1.88 v3(-23.91,4.06)
  In4.Cu w0.08: v2(-50.69,34.68) -50.69,35.32 -49.8,36.21 -36.9,36.21 -36.11,35.42 -36.11,19.6 -33.37,16.86 v2(-32.03,16.86)
  In6.Cu w0.08: v2(-52.19,-21.56) -51.43,-20.8 -51.43,-9.44 -52.21,-8.66 -52.21,18.27 -51.75,18.73 -51.75,26.11 -52.73,27.09 -52.73,27.92 -51.87,28.78 -50.01,28.78 -49.3,29.49 -49.3,33.97 -50.01,34.68 v2(-50.69,34.68)
  In8.Cu w0.08: v1(-30.78,-17.11) -30.78,-16.3 -30.58,-16.1 -29.17,-16.1 -28.37,-16.9 -27.9,-16.9 -27.58,-16.58 -27.58,-15.64 -28.16,-15.06 -28.16,-14.63 -27.72,-14.19 v1(-27.72,-13.83)
  B.Cu w0.08: v2(-52.19,-21.56) -51.48,-21.56 -50.62,-20.7 -50.62,-20.35 -49.16,-18.89 -34.08,-18.89 -32.3,-17.11 v1(-30.78,-17.11)
  B.Cu w0.3: v1(-27.72,-13.83) -27.71,-13.82 J15.11@-26.25,-13.82
Net-(J15-RAS3): J15.49 R94.2 R106.1 | length 11.1
  F.Cu w0.4: v3(-22.49,-7.26) -21.5,-7.26 -21.38,-7.14 R106.1@-20.59,-7.14
  In1.Cu w0.08: v2(-22.88,-14.25) -22.88,-12.92 -22.54,-12.58 -22.54,-12.11 -22.17,-11.74 -22.17,-7.58 v3(-22.49,-7.26)
  B.Cu w0.2: v2(-22.88,-14.25) v2@-22.8,-14.33
  B.Cu w0.3: v2(-22.88,-14.25) -22.81,-14.32 J15.49@-21.25,-14.32
Net-(L5--): C16.1 L5.2 R24.2 | length 16.1
  F.Cu w0.1: C16.1@8.19,48.07 8.295,48.175 v3(8.295,48.285)
  F.Cu w0.4: R24.2@5.68,48.31 6.37,48.31 v2(6.4,48.34)
  In1.Cu w0.1: v2(6.4,48.34) 6.56,48.5 8.08,48.5 v3(8.295,48.285)
  In8.Cu w0.2: v1(-5.5,47.65) 4.91,47.65 5.6,48.34 v2(6.4,48.34)
  B.Cu w0.2: L5.2@-6.36,47.797 -5.647,47.797 v1(-5.5,47.65)
Net-(L8-+): L8.1 R30.1 | length 24.2
  F.Cu w0.2: v2(2.51,54.11) 2.51,52.77 2.61,52.67 2.61,51.19 R30.1@3.17,50.63
  In8.Cu w0.1: v1(-8.89,46.8) -8.88,46.81 -8.88,50.4 -7.88,51.4 -5.16,51.4 -3.86,50.1 2.32,50.1 3.23,51.01 3.23,52.38 2.51,53.1 v2(2.51,54.11)
Net-(L9--): L9.2 Q1.3 R3.2 R236.1 | length 14.4
  F.Cu w0.5: R3.2@-43.78,46.54 -43.21,47.11 -42.76,47.11 -42.38,47.49 -42.38,48.49 -41.81,49.06 Q1.3@-41.7,49.06 -41.7,49.95 v2(-41.66,49.99)
  In8.Cu w0.4: v2(-41.66,49.99) -37.62,45.95 -36.77,45.95 -36.61,45.79 v2(-36.61,45.37)
  B.Cu w0.4: v2(-41.66,49.99) -41.52,49.99 R236.1@-40.78,50.73 ; L9.2@-35.312,45.37 L9.2@-35.272,45.41
  B.Cu w0.5: v2(-36.61,45.37) L9.2@-35.312,45.37
Net-(L11-+): L11.1 R14.2 | length 27.7
  F.Cu w0.08: R14.2@-24.01,40.31 -23.67,40.31 -23.41,40.05 -23.41,38.88 -22.51,37.98 -20.62,37.98 -19.99,38.61 -18.79,38.61 -18.785,38.605 -17.77,39.62 -17.77,41.02 -17.11,41.68 -14.43,41.68 -13.68,42.43 -13.68,43.12 -13.92,43.36 -13.92,44.265 -13.63,44.555 -13.63,45.22 -13.21,45.64 v2(-12.76,45.64)
  In8.Cu w0.08: v1(-16.873,51.4) -16.113,50.64 -13.56,50.64 -12.76,49.84 v2(-12.76,45.64)
Net-(L13-+): L13.1 R221.2 | length 16
  In3.Cu w0.2: v2(-13.09,52.23) -12.09,53.23 -10.44,53.23 -8.54,55.13 -5.74,55.13 -4.56,53.95 v2(-3.73,53.95)
  In8.Cu w0.08: v1(-2.85,53.46) -2.84,53.45 v1@-2.84,53.43
  In8.Cu w0.1: v2(-3.73,53.95) -3.21,53.43 v1@-2.84,53.43
  B.Cu w0.08: L13.1@-14.243,55.2 -14.16,55.2 -12.66,53.7 -12.66,52.66 v2(-13.09,52.23)
Net-(L15--): L15.2 Q20.3 R239.1 R240.1 | length 6.2
  B.Cu w0.5: R240.1@-42.48,46.79 -42.43,46.79 -41.7,47.52 -41.38,47.52 ; Q20.3@-40.29,47.52 -41.38,47.52 ; L15.2@-38.857,48.59 R239.1@-41.435,48.59 -41.435,47.575 -41.38,47.52
Net-(L17-+): L17.1 R20.2 | length 17.1
  F.Cu w0.4: R20.2@-22.84,40.31 -22.63,40.31 -22.16,39.84 v2(-22.16,39.83)
  In3.Cu w0.08: v2(-22.16,39.83) -22.16,43.51 -20.94,44.73 -14.98,44.73 -14.34,45.37 v2(-14.34,47.93)
  B.Cu w0.4: L17.1@-15.343,48.82 -14.453,47.93 v2(-14.34,47.93)
Net-(L18--): L18.2 R17.2 | length 37.1
  In1.Cu w0.08: v2(-30.05,38.52) -30.7,38.52 -30.86,38.68 -30.86,39.98 -30.43,40.41 -25.33,40.41 v3(-25.23,40.31)
  In4.Cu w0.08: v2(-30.05,38.52) -29.55,38.02 -28.28,38.02 -27.865,38.435 -27.865,38.625 -27.45,39.04 -27.26,39.04 -26.57,39.73 -26.57,42.19 -27.07,42.69 -27.07,48.68 -27.6,49.21 -27.6,54.11 v2(-28.55,55.06)
  B.Cu w0.08: v2(-28.55,55.06) -28.35,55.26 -24.33,55.26 -23.25,54.18 L18.2@-20.637,54.18
Net-(Q1-B): Q1.1 R9.2 | length 3
  F.Cu w0.5: R9.2@-46.05,48.55 -45.74,48.55 -44.28,50.01 Q1.1@-43.7,50.01
Net-(Q2-C): Q2.3 R9.1 | length 2.8
  F.Cu w0.3: Q2.3@-48.63,46.39 -48.63,46.69 -47.07,48.25 R9.1@-47.07,48.55
Net-(Q5-B): Q5.2 R111.1 | length 4.9
  F.Cu w0.5: Q5.2@-10.47,14.04 -10.47,13.03 -9.99,12.55 -9.46,12.55 -8.98,12.07 R111.1@-7.015,12.07
Net-(Q7-B): Q7.1 R87.1 | length 1.4
  F.Cu w0.08: Q7.1@-41.9,-12.55 -41.29,-12.55 -41.21,-12.47 R87.1@-40.5,-12.47
Net-(Q7-C): C98.1 Q7.3 R146.2 U30.13 | length 10.1
  F.Cu w0.08: R146.2@-48.29,-16.24 -48.25,-16.2 C98.1@-46.62,-16.2 C98.1@-46.53,-16.11 ; v3(-45.85,-11.8) -45.155,-11.8 U30.13@-45.135,-11.82
  F.Cu w0.3: C98.1@-46.53,-16.11 v3(-46.53,-15.74) ; U30.13@-45.135,-11.82 -44.16,-11.82 -43.93,-12.05 Q7.3@-43.2,-12.05
  In1.Cu w0.08: v3(-46.53,-15.74) -46.56,-15.71 -46.56,-14.54 -47.22,-13.88 -47.22,-12.59 -46.43,-11.8 v3(-45.85,-11.8)
Net-(Q9-B): Q9.1 R107.1 | length 1.5
  F.Cu w0.5: R107.1@-28.16,4.26 -28.16,3.96 -27.57,3.37 Q9.1@-27.57,2.965
Net-(Q9-C): Q9.3 R99.1 | length 1.7
  F.Cu w0.5: R99.1@-29.08,0.54 -29.08,0.99 -28.395,1.675 Q9.3@-28.07,1.675
Net-(Q9-E): D14.1 Q9.2 | length 3.5
  F.Cu w0.5: D14.1@-30.88,1.36 -30.88,2.25 -30.28,2.85 -28.685,2.85 Q9.2@-28.57,2.965
Net-(Q10-B): Q10.1 R97.1 | length 1.9
  F.Cu w0.4: R97.1@-34.61,-4.54 -34.61,-4.77 -33.7,-5.68 Q10.1@-33.7,-6.09
Net-(Q10-C): Q10.3 R100.1 | length 1.6
  F.Cu w0.4: R100.1@-34.47,-8.86 -34.47,-8.44 -34.2,-8.17 Q10.3@-34.2,-7.39
Net-(Q10-E): D15.1 Q10.2 | length 2.4
  F.Cu w0.08: Q10.2@-34.71,-6.09 Q10.2@-34.7,-6.09
  F.Cu w0.4: D15.1@-36.6,-6.45 -35.82,-5.67 -35.13,-5.67 Q10.2@-34.71,-6.09
Net-(Q11-B): Q11.1 R93.2 R99.2 | length 6.1
  F.Cu w0.5: R93.2@-28.56,-0.84 -28.56,-0.29 -28.06,0.21 R99.2@-28.06,0.54 -26.96,0.54 -26.83,0.41 -25.87,0.41 -25.5,0.78 -25.5,1.27 -25.7,1.47 Q11.1@-25.7,2.44
Net-(Q12-B): Q12.1 R85.2 | length 2.6
  F.Cu w0.08: R85.2@-40.14,-9.34 -39.02,-9.34 -38.94,-9.26 Q12.1@-37.59,-9.26
Net-(Q13-B): Q13.1 R95.2 R100.2 | length 3.7
  F.Cu w0.4: R95.2@-33.45,-9.85 R100.2@-33.45,-8.86 -32.65,-8.86 -31.85,-8.06 Q13.1@-31.85,-7.33
Net-(Q14-B): Q14.1 R114.1 | length 1.1
  F.Cu w0.5: R114.1@9.53,5.45 Q14.1@10.6,5.45
Net-(Q15-C): Q15.3 R111.2 | length 1.7
  F.Cu w0.5: R111.2@-5.365,12.07 -4.65,12.07 -4.39,11.81 Q15.3@-3.73,11.81
Net-(Q16-B): Q16.1 R185.2 | length 3
  F.Cu w0.5: R185.2@45.57,-14.79 45.57,-13.32 46.16,-12.73 Q16.1@46.89,-12.73
Net-(Q17-B): Q17.3 U6.39 | length 132.7
  F.Cu w0.08: U6.39@-50.6,8.93 -49.38,8.93 -49.05,9.26 v2(-48.69,9.26)
  In1.Cu w0.08: v3(18.84,-33.665) 19.46,-34.285 v2(19.46,-36.67)
  In3.Cu w0.08: v2(-48.69,9.26) -47.455,8.025 -47.455,2.495 -47.44,2.48 -48.37,1.55 -49.84,1.55 -53.77,-2.38 -53.77,-32.93 -43.1,-43.6 -14.7,-43.6 -12.45,-41.35 13.13,-41.35 14.65,-39.83 14.65,-38.67 16.65,-36.67 v2(19.46,-36.67)
Net-(Q18-C): Q18.3 R185.1 | length 2.7
  F.Cu w0.5: R185.1@45.57,-15.81 45.57,-16.84 46.16,-17.43 Q18.3@47.02,-17.43
Net-(Q19-B): Q19.1 R399.1 | length 4.2
  F.Cu w0.3: Q19.1@11.03,-37.7 11.87,-37.7 v2(11.96,-37.61)
  In8.Cu w0.08: v1(11.32,-34.65) 11.32,-36.97 v2(11.96,-37.61)
Net-(Q19-C): Q19.3 R410.2 | length 2.5
  F.Cu w0.1: v2(9.33,-39.68) 10.01,-39 Q19.3@10.53,-39
  B.Cu w0.4: v2(9.33,-39.68) 9.82,-40.17 R410.2@9.82,-40.52
Net-(Q20-B): Q20.1 R232.1 | length 2.2
  B.Cu w0.5: Q20.1@-39.34,44.9 -38.67,44.23 R232.1@-37.39,44.23
Net-(Q21-B): Q21.1 Q23.1 R237.2 | length 3.1
  B.Cu w0.4: Q23.1@-44.26,42.11 -44.26,41.65 -43.94,41.33 R237.2@-42.84,41.33 -43,41.49 -43,41.98 -43.01,41.99 Q21.1@-43.01,42.39
Net-(Q22-B): Q22.2 Q23.3 R240.2 | length 4.1
  B.Cu w0.5: Q23.3@-44.76,43.41 -44.46,43.41 -43.87,44 Q22.2@-43.87,45.12 -42.77,45.12 -42.46,45.43 -42.46,45.75 R240.2@-42.48,45.77
Net-(Q22-C): Q22.3 R239.2 | length 2.5
  B.Cu w0.5: Q22.3@-44.37,46.67 -44.37,47.305 R239.2@-43.085,48.59
Net-(Q24-C): Q24.3 R238.2 | length 10.4
  F.Cu w0.4: v2(-44.47,51.51) -44.47,52.62 -44.03,53.06 v2(-44.03,58.58)
  B.Cu w0.4: Q24.3@-45.63,51.21 -44.77,51.21 v2(-44.47,51.51)
  B.Cu w0.5: v2(-44.03,58.58) -42.215,58.58 R238.2@-42.205,58.59
Net-(Q25-B): Q25.1 R242.1 | length 1.8
  B.Cu w0.5: Q25.1@-49.56,49.87 -48.59,49.87 v2(-48.53,49.93) -48.34,50.12 R242.1@-47.82,50.12
Net-(Q25-C): Q25.2 R241.2 | length 13.3
  B.Cu w0.08: -53.1,48.38 -53.09,48.37 Q25.2@-49.648,48.37 -53.04,48.37 -53.05,48.38
  B.Cu w0.5: v2(-53.09,46.77) -53.09,48.37 -53.09,50.24 -52.34,50.99 R241.2@-52.34,52.88
Net-(Q26-B): Q26.1 R254.1 | length 1.7
  B.Cu w0.08: R254.1@10.87,26.51 R254.1@10.89,26.49
  B.Cu w0.2: R254.1@10.89,26.49 Q26.1@12.61,26.49
Net-(Q27-B): Q27.1 R262.2 | length 2.1
  B.Cu w0.08: R262.2@-37.99,19.2 -37.99,19.51 -37.71,19.79 -37.25,19.79 -36.96,20.08 Q27.1@-36.96,20.58
Net-(Q28-B): Q28.1 R260.2 U50.1 | length 10.6
  In8.Cu w0.08: v1(-20.8,27.34) -20.42,27.34 -20.13,27.05 v1(-19.22,27.05)
  B.Cu w0.08: R260.2@-23.48,26.83 -23.48,27.06 -23.2,27.34 v1(-20.8,27.34) ; v1(-19.22,27.05) -18.48,27.05 -17.9,26.47 Q28.1@-17.9,24.67
  B.Cu w0.3: U50.1@-24.052,25.2 -24.35,25.498 -24.35,26.56 -24.08,26.83 R260.2@-23.48,26.83
Net-(Q31-B): Q31.1 U66.13 | length 147.2
  In5.Cu w0.08: v2(-39.81,-5.98) -39.81,-5.92 -37.52,-3.63 -36.87,-3.63 -36.15,-2.91 -31.71,-2.91 -31.52,-2.72 -31.48,-2.72 -31.17,-2.41 -30.31,-2.41 -25.83,-6.89 -25.83,-8.1 -25.35,-8.58 -17.16,-8.58 -16.89,-8.85 -9.67,-8.85 -9.46,-9.06 8.4,-9.06 10.75,-6.71 11.29,-6.71 13.85,-9.27 13.85,-10.15 15.7,-12 33.31,-12 34.08,-11.23 42.49,-11.23 42.95,-11.69 43,-11.69 43.36,-12.05 46.87,-12.05 46.89,-12.03 47.28,-12.03 47.5,-11.81 48.39,-11.81 48.93,-12.35 57.3,-12.35 58.48,-13.53 60.61,-13.53 61.48,-12.66 65.32,-12.66 v4(65.71,-13.05)
  In8.Cu w0.08: v2(-39.81,-5.98) -39.81,-5.37 -39.51,-5.07 -39.51,6.95 -38.15,8.31 -34.54,8.31 -34.27,8.58 -34.27,9.78 -36.08,11.59 -36.08,16.47 v1(-36.92,17.31)
  B.Cu w0.3: v4(65.71,-13.05) U66.13@67.007,-13.05
  B.Cu w0.5: Q31.1@-37.21,18.12 -37.21,17.6 v1(-36.92,17.31)
Net-(Q32-B): Q32.1 R289.2 | length 1.6
  In8.Cu w0.08: v1(89.747,-6.01) 91.34,-6.01 v1(91.36,-5.99)
Net-(Q32-C): Q32.3 R291.1 | length 1.4
  B.Cu w0.5: R291.1@87.06,-6.46 87.76,-6.46 87.81,-6.51 Q32.3@88.447,-6.51
Net-(Q33-E): F2.1 Q33.3 R293.2 | length 31
  In3.Cu w0.8: v4(79.77,-7.48) 80.18,-7.89
  In3.Cu w0.9: 80.18,-7.89 80.3,-8.01 80.68,-8.01 81.44,-8.77 81.44,-10.69 85.9,-15.15 90.21,-15.15 92.33,-17.27 92.33,-20.57 92.13,-20.77 v4(91.34,-20.77)
  B.Cu w0.08: F2.1@90.21,-20.81 F2.1@90.21,-20.77
  B.Cu w0.5: v4(79.04,-7.48) 79.04,-6.64 79.3,-6.38 79.63,-6.38 ; Q33.3@79.63,-4.27 79.63,-6.38 ; v4(79.77,-7.48) 79.77,-6.86 80.17,-6.46 ; R293.2@80.88,-6.46 80.17,-6.46 ; 79.63,-6.38 79.71,-6.46 80.17,-6.46
  B.Cu w0.9: F2.1@89.72,-21.3 F2.1@90.21,-20.81 ; F2.1@90.21,-20.77 v4(91.34,-20.77) 91.35,-20.78 v4(91.35,-21.71)
Net-(Q35-B): Q35.1 R321.2 | length 1.3
  B.Cu w0.08: R321.2@3.27,-2.33 3.32,-2.28 4.575,-2.28 Q35.1@4.58,-2.275
Net-(Q35-C): Q35.3 R320.1 | length 1.9
  B.Cu w0.08: Q35.3@5.08,-3.565 5.805,-3.565 5.93,-3.44 R320.1@6.88,-3.44
Net-(Q36-B): Q36.1 R320.2 | length 4.6
  B.Cu w0.08: R320.2@6.88,-2.42 7.18,-2.42 7.6,-2.84 7.72,-2.84 8.33,-3.45 9.37,-3.45 9.8,-3.88 9.8,-4.19 Q36.1@10.37,-4.76
Net-(Q37-B): Q37.1 R368.1 | length 1.8
  B.Cu w0.08: R368.1@86.11,-32.395 86.12,-32.405 R368.1@86.12,-32.43
  B.Cu w0.4: Q37.1@86.1,-34.18 86.1,-32.45 R368.1@86.12,-32.43
Net-(Q38-B): C277.2 Q38.1 R382.2 | length 4.9
  In8.Cu w0.08: v1(40.38,-35.425) 42.345,-33.46 v1(42.96,-33.46)
  B.Cu w0.08: v1(42.96,-33.46) 43.62,-33.46 43.76,-33.32 Q38.1@44.44,-33.32
Net-(Q38-C): Q38.3 R216.2 U35.45 U38.1 | length 66.3
  F.Cu w0.08: v3(7.68,-26.08) 7.85,-26.25 12.17,-26.25 12.51,-26.59 13.64,-26.59 13.85,-26.38 v3(14.25,-26.38) ; v3(27.22,-31.19) 27.285,-31.125 29.995,-31.125 30.95,-32.08 30.95,-34.41 30.76,-34.6 v3(29.94,-34.6) ; v3(33,-41.48) 38.47,-41.48 v3(38.49,-41.5) ; v3(43.5,-43.67) 45.06,-43.67 v2(45.12,-43.61)
  In1.Cu w0.08: v3(4.46,-25.65) 5.22,-25.65 5.48,-25.91 7.34,-25.91 7.51,-26.08 v3(7.68,-26.08) ; v3(14.25,-26.38) 14.69,-26.82 14.69,-28.94 14.17,-29.46 14.17,-29.98 14.75,-30.56 21.68,-30.56 21.78,-30.46 26.49,-30.46 v3(27.22,-31.19) ; v3(29.94,-34.6) 29.94,-35.62 33,-38.68 v3(33,-41.48) ; v3(38.49,-41.5) 40.18,-43.19 41.74,-43.19 42.22,-43.67 v3(43.5,-43.67)
  In8.Cu w0.08: v1(44.94,-34.62) 44.94,-37.53 45.25,-37.84 45.25,-39.88 44.6,-40.53 44.6,-42.14 45.12,-42.66 v2(45.12,-43.61)
Net-(Q39-C): Q39.2 R388.2 | length 2.2
  B.Cu w0.08: Q39.2@25.71,-33.4 Q39.2@25.78,-33.47
  B.Cu w0.3: R388.2@23.56,-33.4 Q39.2@25.71,-33.4
Net-(Q40-C): Q40.2 R386.2 | length 4.8
  In8.Cu w0.08: v6@17.94,-33.72 v6(17.94,-33.71)
  In8.Cu w0.2: v6(17.94,-33.71) 22.25,-33.71 v6(22.56,-33.4)
Net-(Q43-B): Q43.1 R392.1 | length 3.3
  In8.Cu w0.08: v1(10.3,-34.65) 10.72,-35.07 10.72,-37.205 v1(10.34,-37.585)
Net-(Q43-C): Q43.3 R412.2 | length 1.6
  B.Cu w0.08: R412.2@10.83,-40.52 R412.2@10.84,-40.51
  B.Cu w0.4: R412.2@10.84,-40.51 Q43.3@10.84,-38.875
Net-(Q44-B): Q44.1 R398.1 | length 3.4
  B.Cu w0.08: Q44.1@8.27,-37.585 8.27,-36.7 9.3,-35.67 R398.1@9.3,-34.65
Net-(Q44-C): Q44.3 R409.2 | length 1.7
  B.Cu w0.4: R409.2@8.77,-40.52 8.7,-40.45 8.7,-39.47 8.77,-39.4 Q44.3@8.77,-38.875
Net-(R67-Pad1): R67.1 R73.2 U11.1 | length 4.4
  F.Cu w0.08: R73.2@2.15,28.06 2.64,28.06 3.23,28.65 3.39,28.65 3.96,29.22 R67.1@3.96,29.79 3.91,29.74 U11.1@2.44,29.74
Net-(R268-Pad2): R268.2 U52.4 | length 1.6
  B.Cu w0.08: U52.4@-39.18,24.7 -38.2,24.7 -38.07,24.57 R268.2@-37.61,24.57
Net-(R289-Pad1): R289.1 U20.2 | length 130.4
  In1.Cu w0.08: v3@-24.74,-12.35 -24.61,-12.48 v2(-24.61,-14.23)
  In5.Cu w0.08: v2(-24.61,-14.23) -23.86,-13.48 -23.44,-13.48 -23.28,-13.64 -19.5,-13.64 -18.91,-13.05 5.26,-13.05 6.23,-14.02 20.77,-14.02 21.29,-13.5 24.08,-13.5 25.05,-14.47 33.58,-14.47 35.15,-12.9 36.75,-12.9 36.96,-13.11 38.84,-13.11 38.97,-13.24 41.47,-13.24 42.19,-13.96 46.06,-13.96 46.82,-13.2 56.66,-13.2 57.81,-14.35 62.87,-14.35 63.47,-14.95 67.69,-14.95 68.75,-16.01 72.39,-16.01 73.87,-14.53 80.49,-14.53 81.14,-13.88 81.14,-12.56 82.06,-11.64 86.8,-11.64 87.38,-11.06 90,-11.06 v4(91.03,-12.09)
  In8.Cu w0.08: v4(91.03,-12.09) 90.82,-11.88 90.82,-9.29 v1(91.37,-8.74)
  B.Cu w0.08: R289.1@91.36,-7.01 91.36,-8.73 v1(91.37,-8.74)
  other v3: -24.82,-12.33
Net-(R291-Pad2): R291.2 R297.1 | length 1.5
  B.Cu w0.5: R297.1@84.52,-6.46 R291.2@86.04,-6.46
Net-(R321-Pad1): R321.1 U60.4 | length 5.9
  In8.Cu w0.08: v1(-1.07,-2.57) -1.07,-3.19 -0.67,-3.59 3.03,-3.59 v1(3.27,-3.35)
  B.Cu w0.08: U60.4@-1.44,-2.07 -1.44,-2.2 v1(-1.07,-2.57)
Net-(R332-Pad1): R332.1 R340.1 U62.8 | length 5.6
  B.Cu w0.3: R332.1@-35.79,10.77 -35.79,9.12 -34.67,8 U62.8@-34.67,6.683
  B.Cu w0.4: R340.1@-36.79,10.77 R332.1@-35.79,10.77
Net-(R341-Pad2): R341.2 R348.2 U62.6 | length 3.8
  B.Cu w0.4: U62.6@-34.02,0.957 -34.02,-0.65 -33.89,-0.78 R348.2@-33.89,-1.62 R341.2@-32.69,-1.62
Net-(R344-Pad1): R344.1 R353.1 U62.11 | length 7.2
  B.Cu w0.2: U62.11@-32.72,6.683 -32.72,7.85 -32.27,8.3 -29.5,8.3 -29,8.8 ; R344.1@-29,9.49 -29,8.8 ; R353.1@-27.84,8.88 -28.92,8.88 -29,8.8
Net-(R350-Pad2): R350.2 U62.3 | length 3.2
  B.Cu w0.3: U62.3@-32.07,0.957 -32.07,-1.29 R350.2@-31.39,-1.97
Net-(R357-Pad1): R357.1 U62.2 U62.5 U62.12 | length 18.3
  In8.Cu w0.08: v6@-33.28,-0.94 v6(-33.26,-0.92) v6@-33.25,-0.91
  In8.Cu w0.3: v2(-34.92,-2.38) -34.07,-2.38 -33.28,-1.59 v6@-33.28,-0.94 ; v6@-33.25,-0.91 -33.22,-0.94 -31.53,-0.94 v2(-31.5,-0.91)
  B.Cu w0.3: v2(-31.5,-0.91) -31.42,-0.83 U62.2@-31.42,0.957
  B.Cu w0.4: R357.1@-38.72,-2.36 -34.94,-2.36 v2(-34.92,-2.38) ; v6(-33.26,-0.92) -33.26,-0.26 -33.37,-0.15 U62.5@-33.37,0.957 -33.37,4.01 -32.07,5.31 U62.12@-32.07,6.683
Net-(R358-Pad1): R358.1 U62.9 | length 8.5
  B.Cu w0.4: R358.1@-38.45,9.82 -37.35,9.82 -35.5,7.97 -35.5,5.86 -35.12,5.48 -34.31,5.48 -34.02,5.77 U62.9@-34.02,6.683
Net-(R368-Pad2): R368.2 U65.4 | length 2.6
  B.Cu w0.4: R368.2@86.12,-31.41 86.12,-30.99 U65.4@87.66,-29.45
Net-(R370-Pad2): R370.2 U66.10 | length 3.6
  In8.Cu w0.08: v1(66.34,-17.53) 66.34,-16.98 66.47,-16.85 v1(66.47,-15.07)
  B.Cu w0.08: v1(66.47,-15.07) 66.937,-15.07 U66.10@67.007,-15
  B.Cu w0.2: v1(66.34,-17.53) 66.44,-17.63 R370.2@66.44,-18.04
Net-(RA1-R1.1): D26.1 D26.3 RA1.1 U35.69 | length 119.4
  F.Cu w0.2: v3(84.32,7.1) 84.475,7.255 D26.3@85.16,7.255 D26.1@86.485,7.255
  F.Cu w0.3: v3(84.03,3.03) 84.185,3.185 RA1.1@84.185,3.98
  In1.Cu w0.08: v3(15.01,-29.75) 15.01,-27.72 14.91,-27.62 14.91,-26.46 15.53,-25.84 15.53,-24.66 15.13,-24.26 v2(15.13,-22.93) ; v3(84.32,7.1) 84.02,6.8 84.02,3.04 v3(84.03,3.03) 84.02,3.02 84.02,-0.31 84.04,-0.31 v4(88.93,-5.2)
  In5.Cu w0.08: v2(15.13,-22.93) 15.71,-22.35 15.71,-22.29 36.66,-22.29 36.85,-22.48 36.9,-22.48 36.91,-22.47 37.85,-22.47 39.03,-23.65 41.06,-23.65 41.7,-24.29 47.6,-24.29 48,-23.89 49.61,-23.89 49.83,-24.11 52.26,-24.11 53.04,-23.33 70.09,-23.33 71.8,-21.62 77.18,-21.62 78.06,-20.74 88.14,-20.74 88.93,-19.95 88.93,-19.09 92.24,-15.78 92.24,-12.61 88.93,-9.3 v4(88.93,-5.2)
Net-(RA1-R2.1): D28.1 D28.3 RA1.2 U35.68 | length 131.1
  F.Cu w0.08: v3(66.06,-27.74) 66.4,-27.74 66.51,-27.85 70.73,-27.85 v3(71.4,-27.18) ; v3(76.54,-3.68) 77,-3.22 v3(81.72,-3.22) ; v3(82.41,-0.36) 82.41,0.02 83.44,1.05 85.94,1.05 86.37,1.48 D28.3@86.37,2.425 86.37,3.2 84.49,5.08 83.69,5.08 83.385,4.775 RA1.2@83.385,3.98
  F.Cu w0.2: D28.3@86.37,2.425 D28.1@87.695,2.425
  In1.Cu w0.08: v3(14.51,-29.75) 14.89,-30.13 15.09,-30.13 16.66,-28.56 19.65,-28.56 20.94,-27.27 25.54,-27.27 25.86,-26.95 25.86,-20.16 26.44,-19.58 27.1,-19.58 27.69,-18.99 28.48,-18.99 29.23,-18.24 29.23,-17.04 30.3,-15.97 34.1,-15.97 35.89,-14.18 37.17,-14.18 37.83,-14.84 42.29,-14.84 42.95,-15.5 42.95,-23.77 44.05,-24.87 45.76,-24.87 46.09,-25.2 46.09,-25.6 46.3,-25.81 47.23,-25.81 48.17,-26.75 48.17,-28.48 48.7,-29.01 52.97,-29.01 55.61,-26.37 63.66,-26.37 64.14,-26.85 64.14,-27.39 64.49,-27.74 v3(66.06,-27.74) ; v3(71.4,-27.18) 73.8,-24.78 73.8,-23.66 74.52,-22.94 74.78,-22.94 75.05,-22.67 75.18,-22.67 75.36,-22.49 75.36,-22.22 75.03,-21.89 75.03,-20.99 75.4,-20.62 75.4,-18.23 77.03,-16.6 77.03,-15.62 76.29,-14.88 76.29,-11.69 76.51,-11.47 76.51,-8.3 76.31,-8.1 76.31,-6.38 76.41,-6.28 76.41,-5.27 76.31,-5.17 76.31,-5.02 76.54,-4.79 v3(76.54,-3.68) ; v3(81.72,-3.22) 81.72,-1.54 82.41,-0.85 v3(82.41,-0.36)